# Altium PCB PCB1_Lab2.PcbDoc
Units mm, origin at the board's own origin, x right, y up, seen from the top; angles counter-clockwise.
Board outline 144.14 x 111.12 mm, 2 copper layers (Top Layer, Bottom Layer); 17 components, 38 nets, 80 pads, 0 vias.
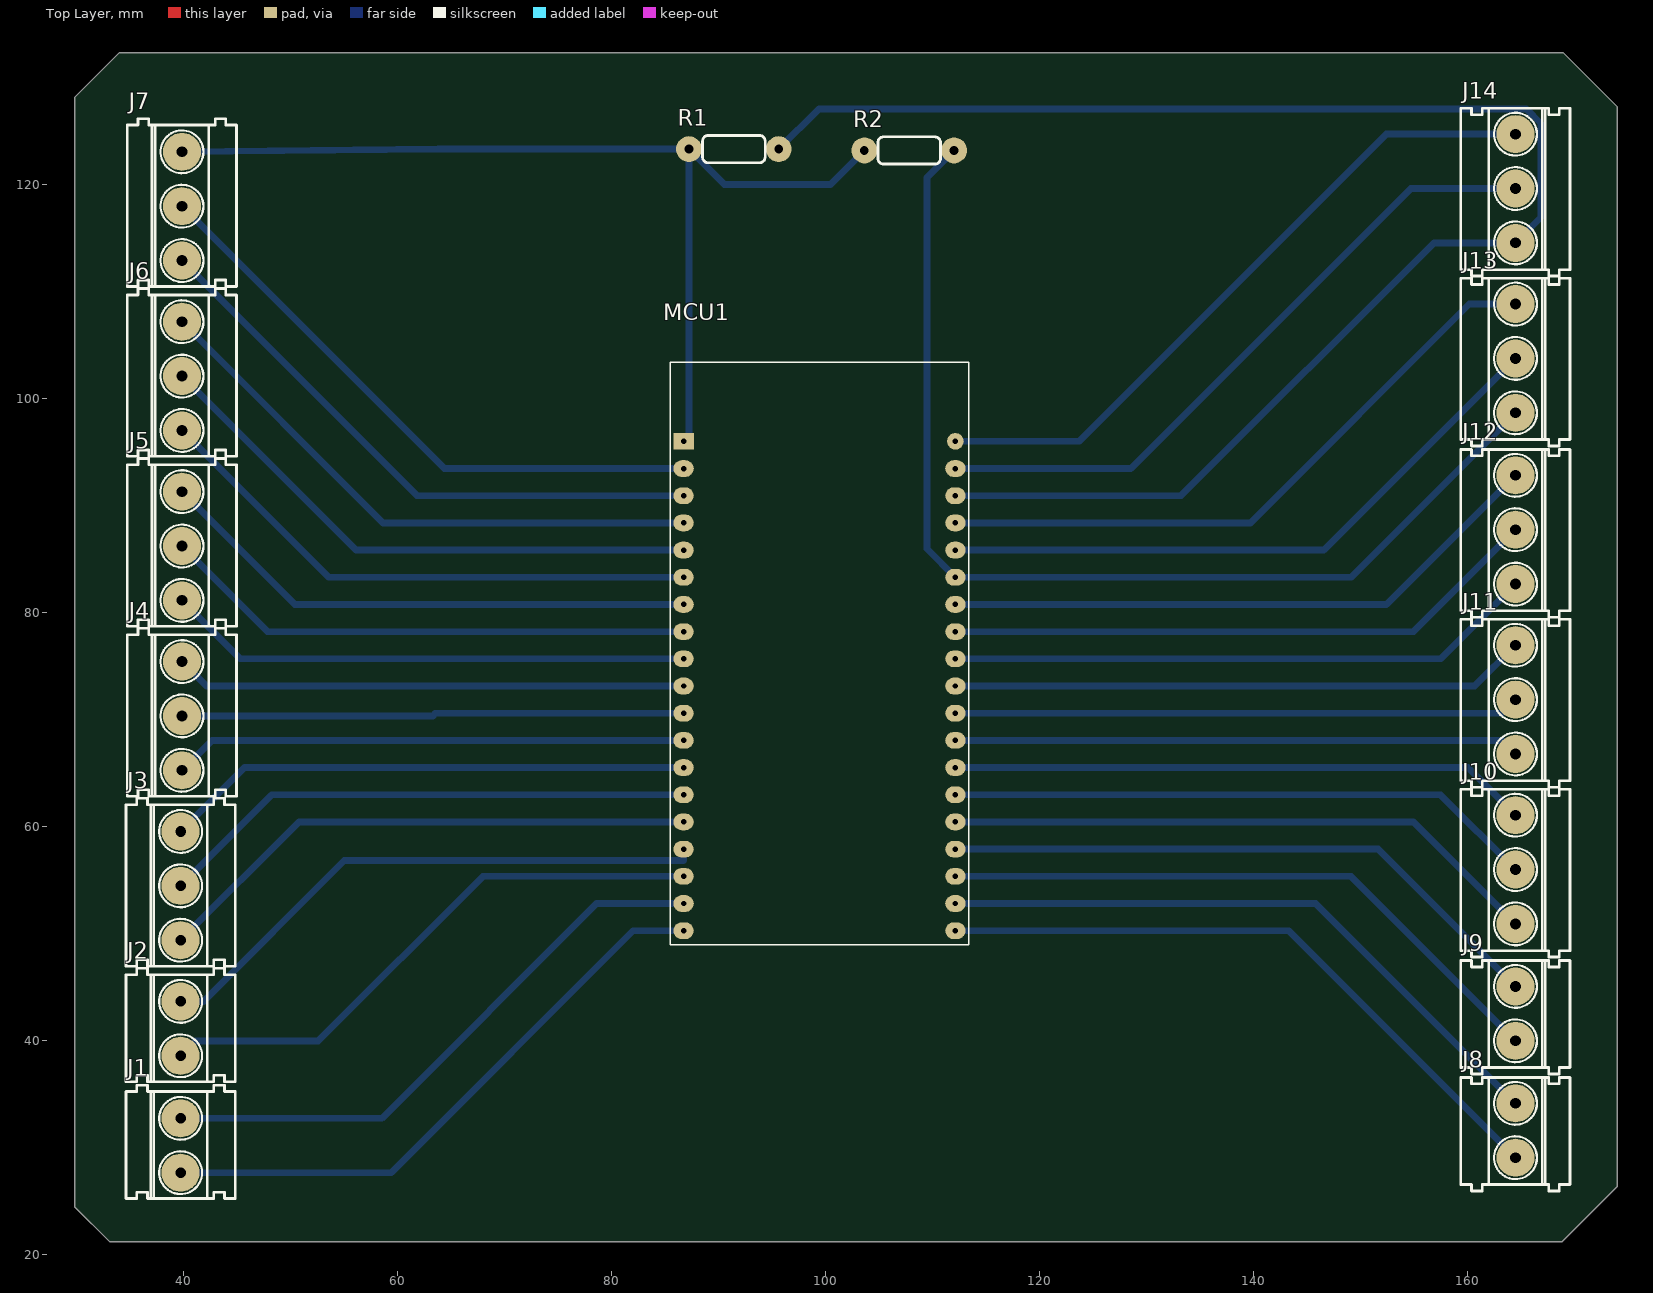
[diagram p0: Top Layer view]
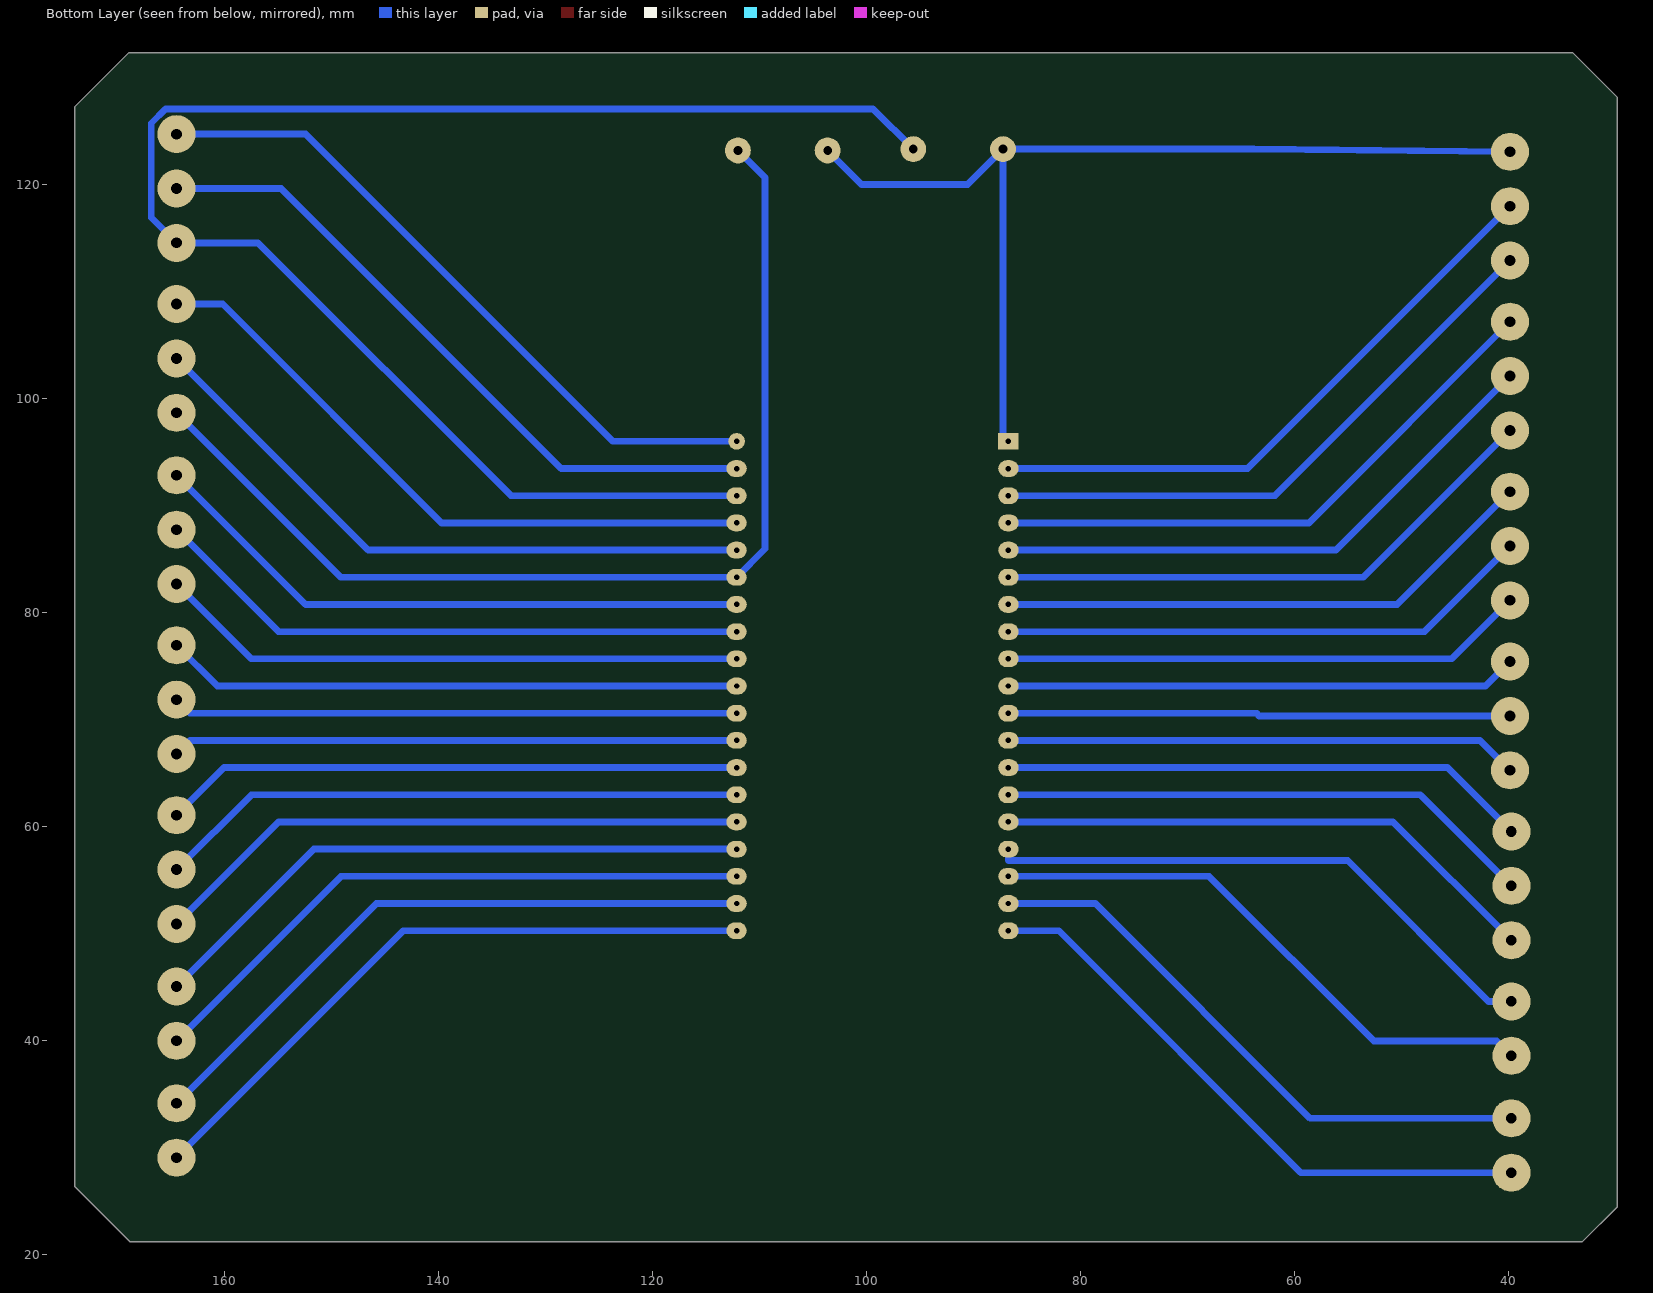
[diagram p1: Bottom Layer view, seen from below]
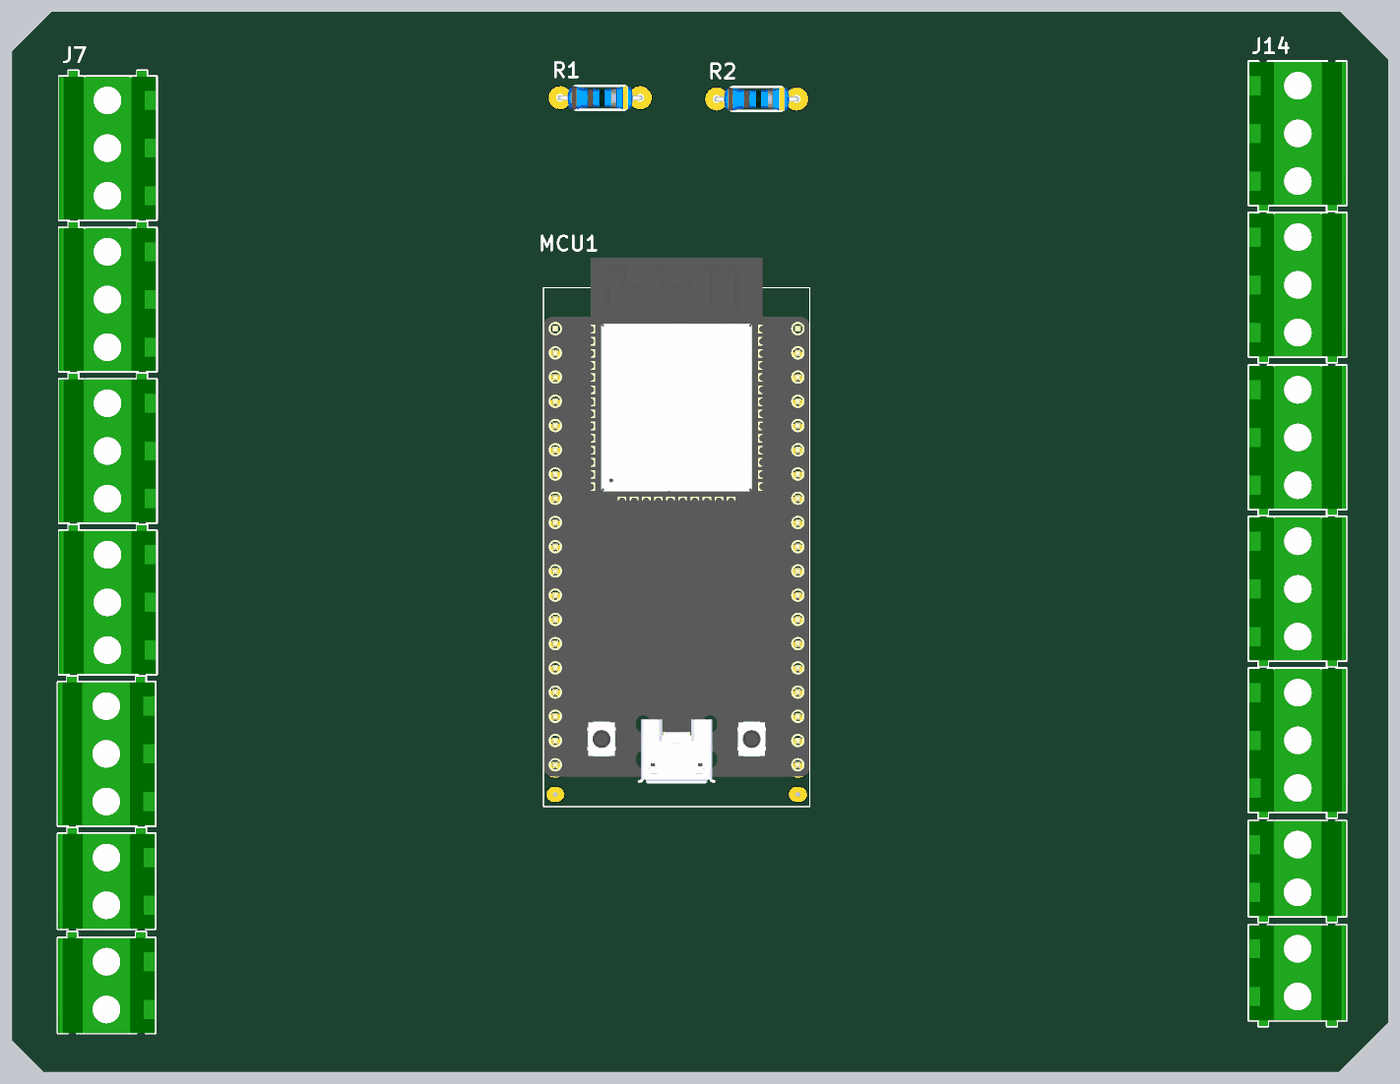
[diagram p2: 3D render of the assembled board from above, using the file's embedded part models]

## Layer stack, top to bottom
Top Solder: solder mask 0.0102, Solder Resist, Dk 3.5
Top Layer: signal copper 0.0356
Dielectric 1: dielectric 0.32, FR-4, Dk 4.8
Bottom Layer: signal copper 0.0356
Bottom Solder: solder mask 0.0102, Solder Resist, Dk 3.5

## Board outline
29.845,24.511 33.147,21.209 168.783,21.209 173.99,26.416 173.99,127.254 168.91,132.334 34.036,132.334 29.845,128.143

## Design rules (kind name [scope] priority, off if disabled: settings)
Clearance [All] p1: gap=0.254 ignorepadtopadclearanceinfootprint=FALSE except(0: Arc-Hole Track-Hole SMDPad-Hole THPad-Hole Via-Hole Fill-Hole Poly-Hole Region-Hole Text-Hole)
PolygonConnect [All] p1: connectstyle=Relief reliefconductorwidth=0.254 reliefentries=4 polygonreliefangle="90 Angle" airgapwidth=0.254
RoutingLayers [All] p1: top layer_v5=FALSE bottom layer_v5=TRUE
RoutingVias [All] p1: holewidth=0.711 width=1.27 viastyle="Through Hole" minholewidth=0.711 minwidth=1.27 maxholewidth=0.711 maxwidth=1.27
SolderMaskExpansion [All] p1: expansion=0.102
Width [All] p1: maxlimit=0.762 minlimit=0.508 preferedwidth=0.635 minimp=50.000000 maximp=50.000000 favimp=50.000000
29 further rules are at their usual default settings.

## Components (designator, comment, footprint, x,y, rotation, side; value= is the part's Value field where it differs from the comment)
J1 "" "TB_200Mil 2 P" 39.751,32.766 r270 top
J2 "" "TB_200Mil 2 P" 39.751,43.688 r270 top
J3 "" "TB_200Mil 3 P" 39.751,59.563 r270 top
J4 "" "TB_200Mil 3 P" 39.878,75.438 r270 top
J5 "" "TB_200Mil 3 P" 39.878,91.313 r270 top
J6 "" "TB_200Mil 3 P" 39.878,107.188 r270 top
J7 "" "TB_200Mil 3 P" 39.878,123.063 r270 top
J8 "" "TB_200Mil 2 P" 164.465,29.083 r90 top
J9 "" "TB_200Mil 2 P" 164.465,40.005 r90 top
J10 "" "TB_200Mil 3 P" 164.465,50.927 r90 top
J11 "" "TB_200Mil 3 P" 164.465,66.802 r90 top
J12 "" "TB_200Mil 3 P" 164.465,82.677 r90 top
J13 "" "TB_200Mil 3 P" 164.465,98.679 r90 top
J14 "" "TB_200Mil 3 P" 164.465,114.554 r90 top
MCU1 "ESP32-DEVKITC-32D" MODULE_ESP32-DEVKITC-32D 99.441,76.252 r0 top
R1 "4.7K" 4.7K 95.631,123.317 r180 top
R2 "4.7K" 4.7K 112.014,123.19 r180 top

## Footprints (in the part's own frame and the unit in brackets; to place one, negate y for a bottom-side part, rotate by r counter-clockwise, add the part's x,y. Pads: shape width x height; smd on the part's side, far side on the other; paste and mask are expansions set on the pad)
4.7K [mil]
  round 95 hole 32: 1(0,0) 2(330,0)
  silkscreen extent 50,-50 280,50, body extent -47,-48 377,50, height 38
MODULE_ESP32-DEVKITC-32D [mm]
  rect 1.905x1.56 hole 0.508: 1(-12.7,19.76)
  oval 1.905x1.56 hole 0.508: 2(-12.7,17.22) 3(-12.7,14.68) 4(-12.7,12.14) 5(-12.7,9.6) 6(-12.7,7.06) 7(-12.7,4.52) 8(-12.7,1.98) 9(-12.7,-0.56) 10(-12.7,-3.1) 11(-12.7,-5.64) 12(-12.7,-8.18) 13(-12.7,-10.72) 14(-12.7,-13.26) 15(-12.7,-15.8) 16(-12.7,-18.34) 17(-12.7,-20.88) 18(-12.7,-23.42) 19(-12.7,-25.96) 21(12.7,17.22) 22(12.7,14.68) 23(12.7,12.14) 24(12.7,9.6) 25(12.7,7.06) 26(12.7,4.52) 27(12.7,1.98) 28(12.7,-0.56) 29(12.7,-3.1) 30(12.7,-5.64) 31(12.7,-8.18) 32(12.7,-10.72) 33(12.7,-13.26) 34(12.7,-15.8) 35(12.7,-18.34) 36(12.7,-20.88) 37(12.7,-23.42) 38(12.7,-25.96)
  round 1.56 hole 0.508: 20(12.7,19.76)
  silkscreen extent -13.95,-27.25 13.95,27.15, body extent -13.97,-24.8 13.97,30.3, height 3.25
"TB_200Mil 2 P" [mil]
  round 140 hole 39.37: 1(0,0) 2(200,0)
  silkscreen extent -122,-201 295,201, body extent -121,-202 296,200, height 551
"TB_200Mil 3 P" [mil]
  round 140 hole 39.37: 1(0,0) 2(200,0) 3(400,0)
  silkscreen extent -122,-201 495,201, body extent -121,-203 493,199, height 551

## Part data
J1 J2 J8 J9: library part "TB 2 PIN"
J3 J4 J5 J6 J7 J10 J11 J12 J13 J14: library part "TB 3 PIN"
MCU1: "EVAL BOARD FOR ESP-WROOM-32", Package=None, Availability=Warning, Check_prices=https://www.snapeda.com/parts/ESP32-DEVKITC-32D/Espressif%20Systems/view-part/2777395/?ref=eda, MF="Espressif Systems", MP=ESP32-DEVKITC-32D, Price=None, Purchase-URL=https://pricing.snapeda.com/search/part/ESP32-DEVKITC-32D/?ref=eda, SnapEDA_Link=https://www.snapeda.com/parts/ESP32-DEVKITC-32D/Espressif%20Systems/view-part/2777395/?ref=snap

## Nets (pads, with @x,y where several pads share a name; then routed paths per layer and width w, separated by ;. In a path a pad name is that pad's centre, name@x,y a point inside that pad or via, vN(x,y) a via of type N, cw(c..) or ccw(c..) an arc to the next point about the centre after c; other vN are vias at no path point)
NetJ1_1: J1.1 MCU1.18 | length 55.3
  Bottom Layer w0.635: J1.1 58.547,32.766 78.613,52.832 MCU1.18
NetJ1_2: J1.2 MCU1.19 | length 56.4
  Bottom Layer w0.635: J1.2 59.436,27.686 82.042,50.292 MCU1.19
NetJ2_1: J2.1 MCU1.16 | length 53.5
  Bottom Layer w0.635: J2.1 41.885,43.688 55.042,56.845 86.741,56.845 MCU1.16
NetJ2_2: J2.2 MCU1.17 | length 53.9
  Bottom Layer w0.635: J2.2 41.123,39.98 52.603,39.98 67.996,55.372 MCU1.17
NetJ3_1: J3.1 MCU1.13 | length 49.5
  Bottom Layer w0.635: J3.1 45.72,65.532 MCU1.13
NetJ3_2: J3.2 MCU1.14 | length 50.5
  Bottom Layer w0.635: J3.2 48.26,62.992 MCU1.14
NetJ3_3: J3.3 MCU1.15 | length 51.6
  Bottom Layer w0.635: J3.3 50.8,60.452 MCU1.15
NetJ4_1: J4.1 MCU1.10 | length 47.8
  Bottom Layer w0.635: J4.1 42.164,73.152 MCU1.10
NetJ4_2: J4.2 MCU1.11 | length 47
  Bottom Layer w0.635: J4.2 63.322,70.358 63.576,70.612 MCU1.11
NetJ4_3: J4.3 MCU1.12 | length 48
  Bottom Layer w0.635: J4.3 42.672,68.072 MCU1.12
NetJ5_1: J5.1 MCU1.7 | length 51.2
  Bottom Layer w0.635: J5.1 50.419,80.772 MCU1.7
NetJ5_2: J5.2 MCU1.8 | length 50.2
  Bottom Layer w0.635: J5.2 47.879,78.232 MCU1.8
NetJ5_3: J5.3 MCU1.9 | length 49.1
  Bottom Layer w0.635: J5.3 45.339,75.692 MCU1.9
NetJ6_1: J6.1 MCU1.4 | length 54.6
  Bottom Layer w0.635: J6.1 58.674,88.392 MCU1.4
NetJ6_2: J6.2 MCU1.5 | length 53.6
  Bottom Layer w0.635: J6.2 56.134,85.852 MCU1.5
NetJ6_3: J6.3 MCU1.6 | length 52.5
  Bottom Layer w0.635: J6.3 53.594,83.312 MCU1.6
NetJ7_1: J7.1 MCU1.1 R1.2 R2.2 | length 94
  Bottom Layer w0.635: J7.1 63.83,123.317 R1.2 ; MCU1.1 87.249,96.485 R1.2 ; R2.2 100.457,120.015 90.551,120.015 R1.2
NetJ7_2: J7.2 MCU1.2 | length 57
  Bottom Layer w0.635: J7.2 64.389,93.472 MCU1.2
NetJ7_3: J7.3 MCU1.3 | length 56
  Bottom Layer w0.635: J7.3 61.849,90.932 MCU1.3
NetJ8_1: J8.1 MCU1.38 | length 61.1
  Bottom Layer w0.635: MCU1.38 143.256,50.292 J8.1
NetJ8_2: J8.2 MCU1.37 | length 60.1
  Bottom Layer w0.635: MCU1.37 145.796,52.832 J8.2
NetJ9_1: J9.1 MCU1.36 | length 58.7
  Bottom Layer w0.635: MCU1.36 149.098,55.372 J9.1
NetJ9_2: J9.2 MCU1.35 | length 57.6
  Bottom Layer w0.635: MCU1.35 151.638,57.912 J9.2
NetJ10_1: J10.1 MCU1.34 | length 56.3
  Bottom Layer w0.635: MCU1.34 154.94,60.452 J10.1
NetJ10_2: J10.2 MCU1.33 | length 55.2
  Bottom Layer w0.635: MCU1.33 157.48,62.992 J10.2
NetJ10_3: J10.3 MCU1.32 | length 54.2
  Bottom Layer w0.635: MCU1.32 160.02,65.532 J10.3
NetJ11_1: J11.1 MCU1.31 | length 52.9
  Bottom Layer w0.635: MCU1.31 163.195,68.072 J11.1
NetJ11_2: J11.2 MCU1.30 | length 52.9
  Bottom Layer w0.635: MCU1.30 163.195,70.612 J11.2
NetJ11_3: J11.3 MCU1.29 | length 53.9
  Bottom Layer w0.635: MCU1.29 160.655,73.152 J11.3
NetJ12_1: J12.1 MCU1.28 | length 55.2
  Bottom Layer w0.635: MCU1.28 157.48,75.692 J12.1
NetJ12_2: J12.2 MCU1.27 | length 56.3
  Bottom Layer w0.635: MCU1.27 154.94,78.232 J12.2
NetJ12_3: J12.3 MCU1.26 | length 57.3
  Bottom Layer w0.635: MCU1.26 152.4,80.772 J12.3
NetJ13_1: J13.1 MCU1.25 R2.1 | length 100.7
  Bottom Layer w0.635: R2.1 109.474,120.65 109.474,85.979 MCU1.25 149.098,83.312 J13.1
NetJ13_2: J13.2 MCU1.24 | length 59.7
  Bottom Layer w0.635: MCU1.24 146.558,85.852 J13.2
NetJ13_3: J13.3 MCU1.23 | length 60.8
  Bottom Layer w0.635: MCU1.23 139.7,88.392 160.147,108.839 J13.3
NetJ14_1: J14.1 MCU1.22 R1.1 | length 147.6
  Bottom Layer w0.635: R1.1 99.39,127.076 165.481,127.076 166.827,125.73 166.827,116.916 J14.1 156.845,114.554 133.223,90.932 MCU1.22
NetJ14_2: J14.2 MCU1.21 | length 63.2
  Bottom Layer w0.635: MCU1.21 128.524,93.472 154.686,119.634 J14.2
NetJ14_3: J14.3 MCU1.20 | length 64.2
  Bottom Layer w0.635: MCU1.20 123.698,96.012 152.4,124.714 J14.3

## Silkscreen, mask and mechanical layers (free items; w line width, h text height)
Mechanical 1:
  lines w0.254: 29.845,24.511 29.845,128.524 33.655,132.334 168.91,132.334 173.99,127.254 173.99,26.416 168.783,21.209 33.147,21.209 29.845,24.511